# Altium PCB motorController_update.PcbDoc
Units mm, origin at the board's own origin, x right, y up, seen from the top; angles counter-clockwise.
Board outline 108.05 x 100.25 mm, 2 copper layers (Top Layer, Bottom Layer); 57 components, 90 nets, 226 pads, 3 vias.
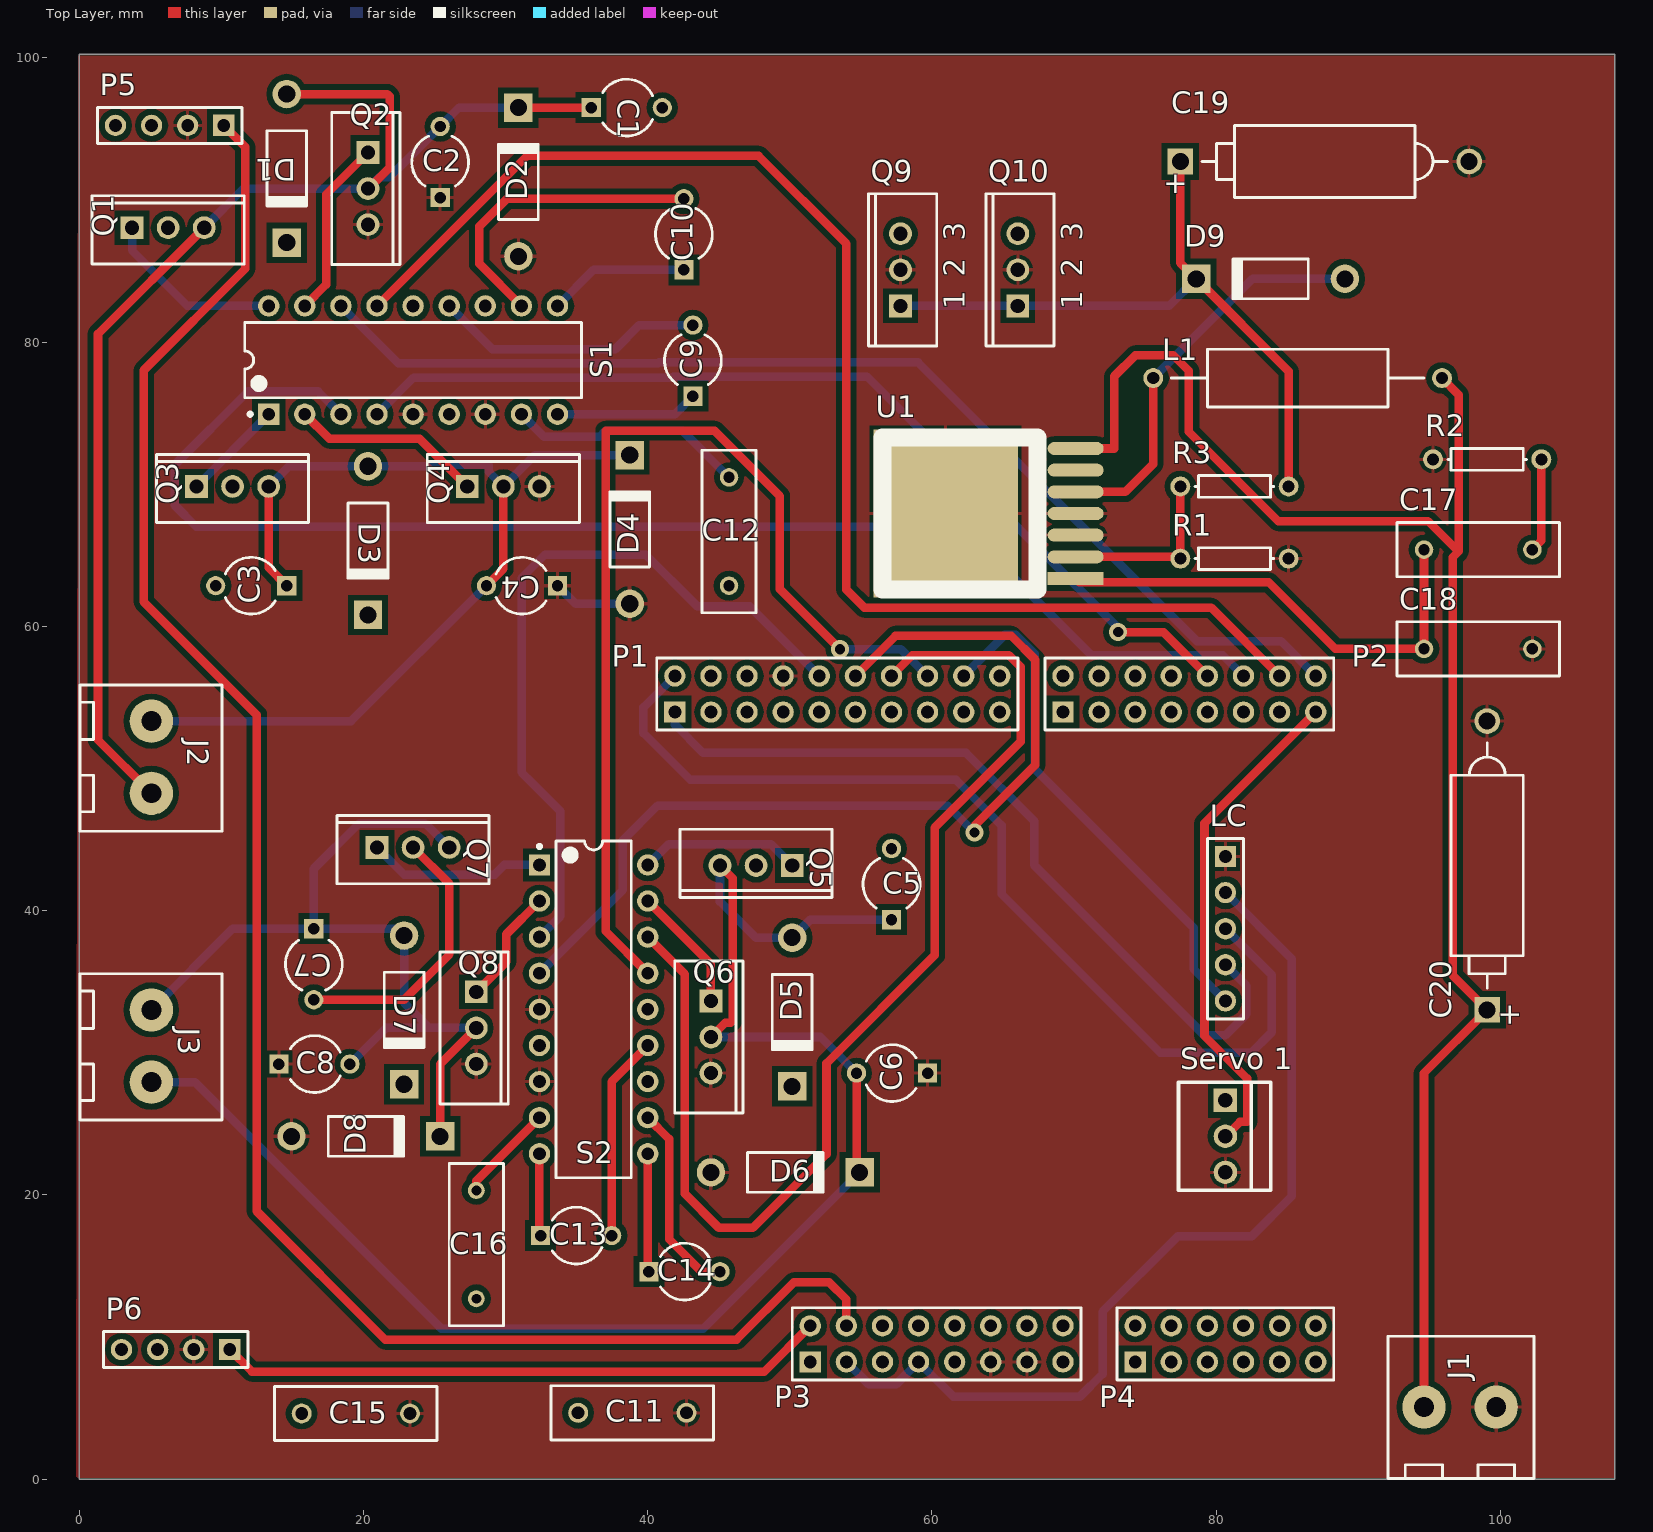
[diagram p0: Top Layer view]
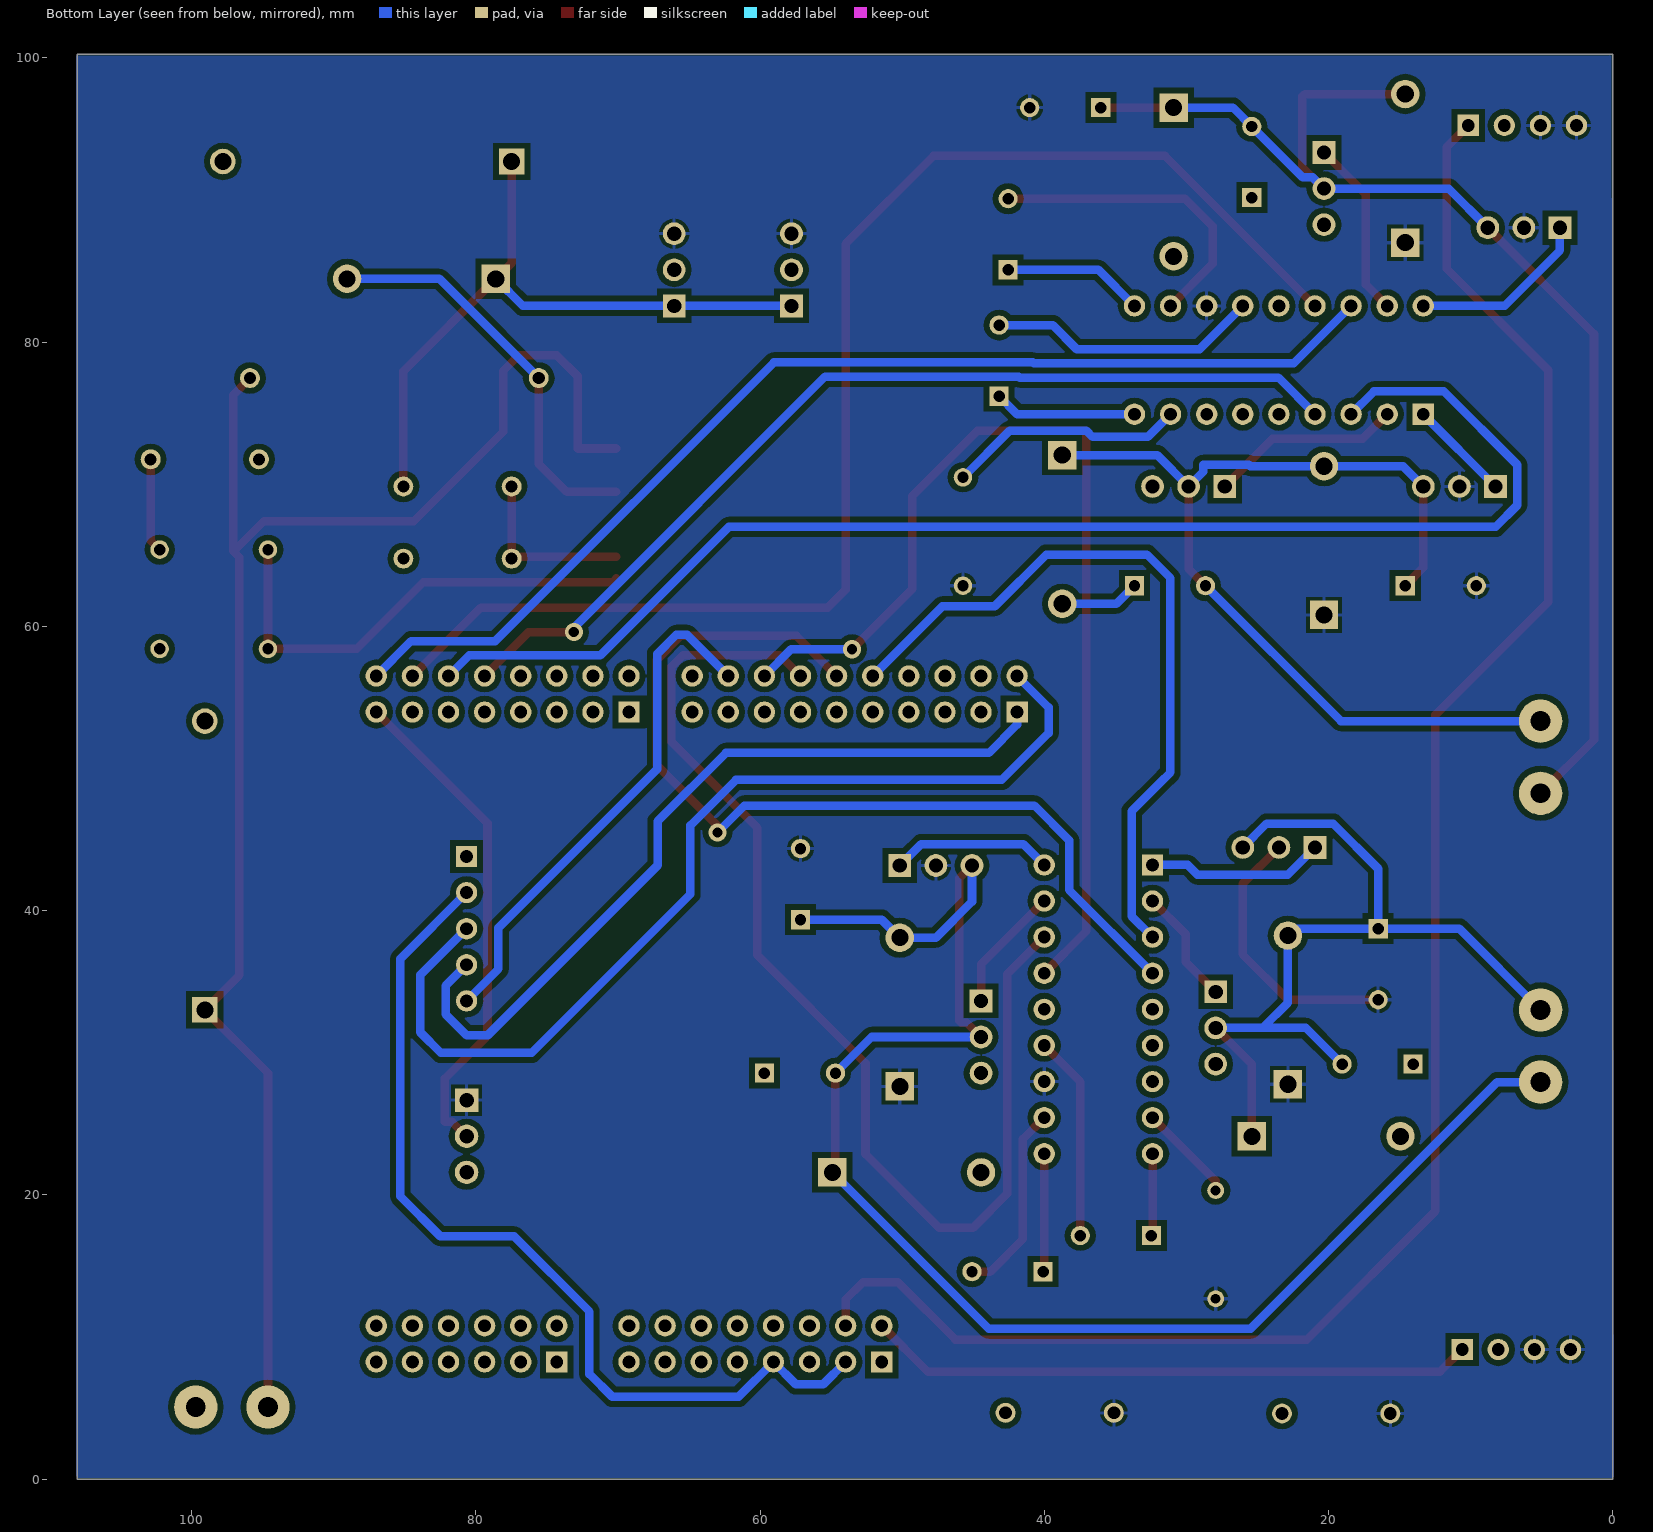
[diagram p1: Bottom Layer view, seen from below]

## Layer stack, top to bottom
Top Solder: solder mask 0.0102, Solder Resist, Dk 3.5
Top Layer: signal copper 0.0356
Dielectric1: dielectric 0.32, FR-4, Dk 4.8
Bottom Layer: signal copper 0.0356
Bottom Solder: solder mask 0.0102, Solder Resist, Dk 3.5

## Board outline
0,0 0,100.25 108.05,100.25 108.05,0

## Design rules (kind name [scope] priority, off if disabled: settings)
Clearance [All] p1: gap=0.4
HoleSize [All] p1: absolutevalues=TRUE maxlimit=5 minlimit=0.025 maxpercent=80.000 minpercent=20.000
PolygonConnect [All] p1: connectstyle=Relief reliefconductorwidth=0.254 reliefentries=4 polygonreliefangle="90 Angle" airgapwidth=0.254
RoutingVias [All] p1: holewidth=0.711 width=1.27 viastyle="Through Hole" minholewidth=0.711 minwidth=1.27 maxholewidth=0.711 maxwidth=1.27
SilkToSolderMaskClearance SilkscreenOverComponentPads [IsPad] p1: minsilkscreentomaskgap=0.254 clearancetoexposedcopper=TRUE
SolderMaskExpansion [All] p1: expansion=0.102
Width ThickWidth [All] p1: maxlimit=3 minlimit=0.254 preferedwidth=0.6 minimp=50.000000 maximp=50.000000 favimp=50.000000
28 further rules are at their usual default settings.

## Components (designator, comment, footprint, x,y, rotation, side; value= is the part's Value field where it differs from the comment)
C1 "Cap2" CAPR5-4X5 38.525,96.5 r0 top
C2 "Cap2" CAPR5-4X5 25.4,92.67 r90 top
C3 "Cap2" CAPR5-4X5 12.105,62.865 r180 top
C4 "Cap2" CAPR5-4X5 31.155,62.865 r180 top
C5 "Cap2" CAPR5-4X5 57.15,41.87 r90 top
C6 "Cap2" CAPR5-4X5 57.19,28.575 r180 top
C7 "Cap2" CAPR5-4X5 16.51,36.235 r270 top
C8 "Cap2" CAPR5-4X5 16.55,29.21 r0 top
C9 "Cap2" CAPR5-4X5 43.18,78.7 r90 top
C10 "Cap2" CAPR5-4X5 42.545,87.59 r90 top
C11 "Cap" RAD-0.3#1 38.915,4.675 r0 top
C12 "Cap" RAD-0.3#2 45.72,66.675 r270 top
C13 "Cap2" CAPR5-4X5 34.965,17.145 r0 top
C14 "Cap2" CAPR5-4X5 42.585,14.605 r0 top
C15 "Cap" RAD-0.3#1 19.465,4.625 r0 top
C16 "Cap" RAD-0.3#3 27.94,16.51 r270 top
C17 "Cap" RAD-0.3#2 98.425,65.405 r180 top
C18 "Cap" RAD-0.3#2 98.425,58.42 r180 top
C19 "Cap Pol2" POLAR0.8 87.63,92.71 r180 top
C20 "Cap Pol2" POLAR0.8 99.06,43.18 r270 top
D1 "Diode 1N4004" DO-41 14.605,92.225 r270 top
D2 "Diode 1N4004" DO-41 30.9,91.27 r90 top
D3 "Diode 1N4004" DO-41 20.32,66.04 r270 top
D4 "Diode 1N4004" DO-41 38.735,66.825 r90 top
D5 "Diode 1N4004" DO-41 50.165,32.87 r270 top
D6 "Diode 1N4004" DO-41 49.68,21.59 r0 top
D7 "Diode 1N4004" DO-41 22.86,33.02 r270 top
D8 "Diode 1N4004" DO-41 20.17,24.13 r0 top
D9 "Diode 1N4934" DO-41 83.82,84.455 r180 top
J1 "282857-2" 282857-2 94.615,5.08 r270 top
J2 "282857-2" 282857-2 5.08,53.34 r180 top
J3 "282857-2" 282857-2 5.08,33.02 r180 top
L1 "Inductor Adj" AXIAL-0.8 85.725,77.47 r0 top
LC "Header 5" HDR1X5 80.645,43.815 r270 top
P1 "Header 10X2" HDR2X10 41.91,53.975 r0 top
P2 "Header 8X2" HDR2X8 69.215,53.975 r0 top
P3 "Header 8X2" HDR2X8 51.435,8.255 r0 top
P4 "Header 6X2" HDR2X6 74.295,8.255 r0 top
P5 "Header 4" HDR1X4 10.175,95.25 r180 top
P6 "Header 4" HDR1X4 10.6,9.125 r180 top
Q1 "SCR" TO-220-AB 6.26,88.05 r0 top
Q2 "SCR" TO-220-AB 20.32,90.805 r270 top
Q3 "SCR" TO-220-AB 10.795,69.85 r0 top
Q4 "SCR" TO-220-AB 29.845,69.85 r0 top
Q5 "SCR" TO-220-AB 47.625,43.18 r180 top
Q6 "SCR" TO-220-AB 44.45,31.115 r270 top
Q7 "SCR" TO-220-AB 23.495,44.45 r0 top
Q8 "SCR" TO-220-AB 27.94,31.75 r270 top
Q9 "SCR" TO-220-AB 57.785,85.09 r90 top
Q10 "SCR" TO-220-AB 66.04,85.09 r90 top
R1 "Res1" AXIAL-0.3 81.28,64.77 r180 top
R2 "Res1" AXIAL-0.3 99.06,71.755 r0 top
R3 "Res1" AXIAL-0.3 81.28,69.85 r0 top
S1 "MAX620" DIP-18 23.495,78.74 r90 top
S2 "MAX620" DIP-18 36.195,33.06 r0 top
"Servo 1" "640454-3" 6404543 80.645,24.13 r0 top
U1 "LT1370" DDPak7 70.104,67.945 r90 top

## Footprints (in the part's own frame and the unit in brackets; to place one, negate y for a bottom-side part, rotate by r counter-clockwise, add the part's x,y. Pads: shape width x height; smd on the part's side, far side on the other; paste and mask are expansions set on the pad)
282857-2 [mil] "TE CONNECTIVITY / BUCHANAN  282857-2  Wire-To-Board Terminal Block, 2, 300 V, 24 A, 30 AWG, 12 AWG, 3 mm²"
  round 120 hole 55: 1(0,0) 2(0,200)
  silkscreen extent -196,-100 198,305, body extent -196,-100 198,320, height 752
6404543 [mil] "Headers & Wire Housings POLARIZED HEADER 3P Straight Post tin"
  rect 65x65 hole 40: 1(0,100)
  round 65 hole 40: 2(0,0) 3(0,-100)
  silkscreen extent -130,-150 126,150, body extent -130,-150 125,150, height 395
AXIAL-0.3 [mm] "Axial Device, Thru-Hole; 2 Leads; 0.3 in Pin Spacing"
  round 1.4 hole 0.85: 1(-3.81,0) 2(3.81,0)
  silkscreen extent -2.77,-0.76 2.77,0.76
AXIAL-0.8 [mm] "Axial Device, Thru-Hole; 2 Leads; 0.8 in Pin Spacing"
  round 1.4 hole 0.85: 1(-10.16,0) 2(10.16,0)
  silkscreen extent -8.89,-2.03 8.89,2.03
CAPR5-4X5 [mm] "Capacitor; 2 Leads"
  rect 1.35x1.35 hole 0.8: 1(-2.5,0)
  round 1.35 hole 0.8: 2(2.5,0)
  silkscreen extent -1.69,-2 1.82,2
DDPak7 [mil] "7 Lead Plastic DD Pak"
  rect 36x155 smd: 1(-180,0)
  oval 36x155 smd: 2(-120,0) 3(-60,0) 4(0,0) 5(60,0) 6(120,0) 7(180,0)
  rect 465x400 smd: 4(0,360)
  silkscreen extent -210,105 210,535
DIP-18 [mm] "DIP; 18 Leads; Row Spacing 7.62 mm; Pitch 2.54 mm"
  rect 1.5x1.5 hole 0.9: 1(-3.81,10.16)
  round 1.5 hole 0.9: 2(-3.81,7.62) 3(-3.81,5.08) 4(-3.81,2.54) 5(-3.81,0) 6(-3.81,-2.54) 7(-3.81,-5.08) 8(-3.81,-7.62) 9(-3.81,-10.16) 10(3.81,-10.16) 11(3.81,-7.62) 12(3.81,-5.08) 13(3.81,-2.54) 14(3.81,0) 15(3.81,2.54) 16(3.81,5.08) 17(3.81,7.62) 18(3.81,10.16)
  silkscreen extent -3.93,-11.85 2.65,11.85, body extent -3.6,-11.8 3.6,11.8, height 5.08
DO-41 [mm] "Diode, Axial; Body 5.2 x 2.7 mm (LxDia. max), Lead Dia. 0.86 mm (max)"
  round 2 hole 1.2: 1(-5.23,0)
  rect 2x2 hole 1.2: 2(5.23,0)
  silkscreen extent -2.65,-1.4 2.75,1.4
HDR1X4 [mm] "Connector; Header; 4 Position"
  rect 1.5x1.5 hole 0.9: 1(0,0)
  round 1.5 hole 0.9: 2(2.54,0) 3(5.08,0) 4(7.62,0)
  silkscreen extent -1.27,-1.27 8.89,1.27
HDR1X5 [mm] "Connector; Header; 5 Position"
  rect 1.5x1.5 hole 0.9: 1(0,0)
  round 1.5 hole 0.9: 2(2.54,0) 3(5.08,0) 4(7.62,0) 5(10.16,0)
  silkscreen extent -1.27,-1.27 11.43,1.27
HDR2X6 [mm] "Connector; Header; 6x2 Position"
  rect 1.5x1.5 hole 0.9: 1(0,0)
  round 1.5 hole 0.9: 2(0,2.54) 3(2.54,0) 4(2.54,2.54) 5(5.08,0) 6(5.08,2.54) 7(7.62,0) 8(7.62,2.54) 9(10.16,0) 10(10.16,2.54) 11(12.7,0) 12(12.7,2.54)
  silkscreen extent -1.27,-1.27 13.97,3.81
HDR2X8 [mm] "Connector; Header; 8x2 Position"
  rect 1.5x1.5 hole 0.9: 1(0,0)
  round 1.5 hole 0.9: 2(0,2.54) 3(2.54,0) 4(2.54,2.54) 5(5.08,0) 6(5.08,2.54) 7(7.62,0) 8(7.62,2.54) 9(10.16,0) 10(10.16,2.54) 11(12.7,0) 12(12.7,2.54) 13(15.24,0) 14(15.24,2.54) 15(17.78,0) 16(17.78,2.54)
  silkscreen extent -1.27,-1.27 19.05,3.81
HDR2X10 [mm] "Connector; Header; 10x2 Position"
  rect 1.5x1.5 hole 0.9: 1(0,0)
  round 1.5 hole 0.9: 2(0,2.54) 3(2.54,0) 4(2.54,2.54) 5(5.08,0) 6(5.08,2.54) 7(7.62,0) 8(7.62,2.54) 9(10.16,0) 10(10.16,2.54) 11(12.7,0) 12(12.7,2.54) 13(15.24,0) 14(15.24,2.54) 15(17.78,0) 16(17.78,2.54) 17(20.32,0) 18(20.32,2.54) 19(22.86,0) 20(22.86,2.54)
  silkscreen extent -1.27,-1.27 24.13,3.81
POLAR0.8 [mm] "Polarized Capacitor; 2 Leads"
  rect 1.8x1.8 hole 1.2: 1(10.16,0)
  round 1.8 hole 1.2: 2(-10.16,0)
  silkscreen extent -8.64,-2.54 8.64,2.54
RAD-0.3#1 [mm] "Radial Cap, Thru-Hole; 2 Leads; 0.3 in Pin Spacing"
  round 1.4 hole 0.9: 1(-3.81,0) 2(3.81,0)
  silkscreen extent -5.71,-1.91 5.71,1.91
RAD-0.3#2 [mm] "Radial Cap, Thru-Hole; 2 Leads; 0.3 in Pin Spacing"
  round 1.3 hole 0.8: 1(-3.81,0) 2(3.81,0)
  silkscreen extent -5.71,-1.91 5.71,1.91
RAD-0.3#3 [mm] "Radial Cap, Thru-Hole; 2 Leads; 0.3 in Pin Spacing"
  round 1.2 hole 0.7: 1(-3.81,0) 2(3.81,0)
  silkscreen extent -5.71,-1.91 5.71,1.91
TO-220-AB [mm] "TO, Thru-Hole, Vertical, Heatsink Mounted; 3 In-Line Leads; Pitch 2.54 mm"
  rect 1.6x1.6 hole 1: 1(-2.54,0)
  round 1.6 hole 1: 2(0,0) 3(2.54,0)
  silkscreen extent -5.35,-2.55 5.35,2.25

## Part data
C1 C2 C3 C4 C5 C6 C7 C8 C9 C10 C11 C12 C13 C14 C15 C16 C17 C18: "Capacitor"
C19 C20: "Polarized Capacitor (Axial)"
D1 D2 D3 D4 D5 D6 D7 D8: "1 Amp General Purpose Rectifier"
D9: "1 Amp Fast Recovery Rectifier"
L1: "Adjustable Inductor"
LC: "Header, 5-Pin"
P1: "Header, 10-Pin, Dual row"
P2 P3: "Header, 8-Pin, Dual row"
P4: "Header, 6-Pin, Dual row"
P5 P6: "Header, 4-Pin"
Q1 Q2 Q3 Q4 Q5 Q6 Q7 Q8 Q9 Q10: "Silicon Controlled Rectifier"
R1 R2 R3: "Resistor"
S1 S2: library part "SW DIP-9", "DIP Switch, 9 Position, SPST"
"Servo 1": "Headers & Wire Housings POLARIZED HEADER 3P Straight Post tin"

## Via types
v1: diameter 1.27, hole 0.711, Top Layer to Bottom Layer, 3 vias

## Nets (pads, with @x,y where several pads share a name; then routed paths per layer and width w, separated by ;. In a path a pad name is that pad's centre, name@x,y a point inside that pad or via, vN(x,y) a via of type N, cw(c..) or ccw(c..) an arc to the next point about the centre after c; other vN are vias at no path point)
3V3: LC.2 P3.3 P3.7 | length 65.4
  Bottom Layer w0.6: P3.3 55.55,6.68 57.48,6.68 P3.7 61.51,5.8 70.4,5.8 72,7.4 72,11.8 77.3,17.1 82.5,17.1 85.3,19.9 85.3,36.62 LC.2
"5-9 VIN": P3.15
5V: "Servo 1.1" C1.2 C3.2 C5.2 C7.2 C11.1 C12.2 C15.1 C16.2 D1.2 D3.2 D5.2 D7.2 P5.3 P5.4 P6.3 P6.4 Q1.2 Q3.2 Q5.2 Q7.2 Q9.3 Q10.3 S1.12 S2.12 | length 19.4
  Top Layer w0.6: C7.2 22.86,33.735 26.05,36.925 26.05,41.895 Q7.2
5V/USB: P3.9
12_OUT: C19.1 D9.2 Q9.1 Q10.1 R3.2 | length 47.6
  Top Layer w0.6: C19.1 77.47,85.575 D9.2 85.09,77.955 R3.2
  Bottom Layer w0.6: Q9.1 Q10.1 76.685,82.55 D9.2
AREF: P1.6
GND: "Servo 1.3" C2.1 C4.1 C6.1 C8.1 C11.2 C15.2 C18.1 C19.2 C20.2 D2.1 D4.1 D6.1 D8.1 J1.2 LC.1 P1.8 P3.11 P3.13 P5.2 P6.2 Q2.3 Q4.3 Q6.3 Q8.3 Q9.2 Q10.2 R1.1 R2.1 S1.5 S1.7 S2.5 S2.7 U1.3 U1.4 | length 5.6
  Bottom Layer w0.6: C4.1 34.925,61.595 D4.1
"LM 1": Q1.1 S1.18 | length 12.8
  Bottom Layer w0.6: Q1.1 3.72,86.45 7.62,82.55 S1.18
"LM 2": Q2.1 S1.17 | length 12.6
  Top Layer w0.6: S1.17 17.374,84.049 17.374,90.399 Q2.1
"LM 3": Q3.1 S1.1 | length 7.2
  Bottom Layer w0.6: Q3.1 S1.1
"LM 4": Q4.1 S1.2 | length 13.5
  Top Layer w0.6: S1.2 17.602,73.203 23.952,73.203 Q4.1
M1+: C1.1 C2.2 D1.1 D2.2 J2.2 Q1.3 Q2.2 | length 89.7
  Top Layer w0.6: J2.2 1.325,52.015 1.325,80.575 Q1.3 ; D1.1 21.671,97.455 21.844,97.282 21.844,92.267 Q2.2@20.305,90.728 ; D2.2 C1.1
  Bottom Layer w0.6: Q1.3 11.555,90.805 Q2.2 21.107,91.592 21.822,91.592 C2.2 26.73,96.5 D2.2
M1-: C3.1 C4.2 D3.1 D4.2 J2.1 Q3.3 Q4.2 | length 70.4
  Top Layer w0.6: Q3.3 13.335,64.135 C3.1 ; C4.2 29.845,64.055 Q4.2
  Bottom Layer w0.6: J2.1 19.13,53.34 C4.2 ; Q3.3 14.755,71.27 D3.1 25.502,71.27 25.606,71.374 28.829,71.374 28.829,70.866 Q4.2 32.05,72.055 D4.2
M2+: C5.1 C6.2 D5.1 D6.2 J3.2 Q5.3 Q6.2 | length 109.4
  Top Layer w0.6: Q6.2 45.466,32.131 45.847,32.131 45.974,32.258 45.974,42.291 Q5.3 ; C6.2 54.69,21.81 D6.2
  Bottom Layer w0.6: J3.2 8.135,27.94 25.475,10.6 43.92,10.6 D6.2 ; Q6.2 52.15,31.115 C6.2 ; Q5.3 45.085,40.64 47.625,38.1 D5.1 51.435,39.37 C5.1
M2-: C7.1 C8.2 D7.1 D8.2 J3.1 Q7.3 Q8.2 | length 61.9
  Top Layer w0.6: D8.2 25.4,29.21 Q8.2
  Bottom Layer w0.6: J3.1 10.795,38.735 C7.1 ; C8.2 21.59,31.75 24.638,31.75 ; Q7.3 24.359,46.126 19.685,46.126 16.51,42.951 C7.1 ; Q8.2 24.638,31.75 ; C7.1 22.375,38.735 D7.1 22.86,33.528 24.638,31.75
NC: P1.5
NetC9_1: C9.1 S1.9 | length 10.1
  Bottom Layer w0.6: S1.9 41.91,74.93 C9.1
NetC9_2: C9.2 S1.13 | length 19.1
  Bottom Layer w0.6: S1.13 29.08,79.505 37.711,79.505 39.406,81.2 C9.2
NetC10_1: C10.1 S1.10 | length 9.9
  Bottom Layer w0.6: S1.10 36.195,85.09 C10.1
NetC10_2: C10.2 S1.11 | length 22
  Top Layer w0.6: S1.11 28.143,85.522 28.143,88.138 30.095,90.09 C10.2
NetC12_1: C12.1 S1.8 | length 16.8
  Bottom Layer w0.6: S1.8 32.715,73.33 36.601,73.33 37.033,73.762 42.443,73.762 C12.1
NetC13_1: C13.1 S2.9 | length 5.8
  Top Layer w0.6: S2.9 32.385,17.225 C13.1
NetC13_2: C13.2 S2.13 | length 14.4
  Top Layer w0.6: C13.2 37.465,27.98 S2.13
NetC14_1: C14.1 S2.10 | length 8.3
  Top Layer w0.6: S2.10 40.005,14.685 C14.1
NetC14_2: C14.2 S2.11 | length 13.7
  Top Layer w0.6: S2.11 41.5,23.945 41.5,16.9 43.795,14.605 C14.2
NetC16_1: C16.1 S2.8 | length 7
  Top Layer w0.6: C16.1 27.94,20.995 S2.8
NetC17_1: C17.1 R2.2 | length 6.6
  Top Layer w0.6: C17.1 102.87,66.04 R2.2
NetC17_2: C17.2 C18.2 U1.1 | length 33.5
  Top Layer w0.6: U1.1 70.377,63.1 83.7,63.1 88.38,58.42 C18.2 C17.2
NetD9_1: D9.1 L1.1 U1.5 | length 28.7
  Top Layer w0.6: U1.5 73.609,69.469 75.565,71.425 L1.1
  Bottom Layer w0.6: L1.1 82.55,84.455 D9.1
NetR1_2: R1.2 R3.1 U1.2 | length 12.5
  Top Layer w0.6: U1.2 77.343,64.897 R1.2 R3.1
PTA1: P2.14 S1.15 | length 97.3
  Top Layer w0.6: S1.15 31.505,93.1 47.8,93.1 53.975,86.925 53.975,62.586 55.245,61.316 79.654,61.316 P2.14
PTA2: P2.16 S1.16 | length 79.4
  Bottom Layer w0.6: S1.16 22.46,78.505 40.735,78.505 40.805,78.575 59.017,78.575 78.627,58.965 84.545,58.965 P2.16
PTA4: P2.8
PTA5: P2.6
PTA12: P2.10 S1.4 | length 68.4
  Top Layer w0.6: v1(73.1,59.6) 76.3,59.6 76.295,59.595 P2.10
  Bottom Layer w0.6: S1.4 23.53,77.505 41.713,77.505 41.783,77.575 55.419,77.575 73.1,59.894 v1(73.1,59.6)
PTA13: P1.20
PTA16: P1.11
PTA17: P1.9
PTA20/RESET: P3.5
PTB0: P4.1
PTB1: P4.3
PTB2: P4.5
PTB3: P4.7
PTB8: P3.2 P6.1 | length 42.8
  Top Layer w0.6: P6.1 12.15,7.575 48.215,7.575 P3.2
PTB9: P3.4 P5.1 | length 132.5
  Top Layer w0.6: P5.1 11.675,93.75 11.675,85.15 4.55,78.025 4.55,61.725 12.5,53.775 12.5,18.85 21.525,9.825 46.25,9.825 50.275,13.85 52.775,13.85 53.975,12.65 P3.4
PTB10: P3.6
PTB11: P3.8
PTC0: P2.13
PTC1: P4.11
PTC2: P4.9
PTC3: P2.11
PTC4: P2.9
PTC5: P2.7
PTC6: P2.5
PTC7: "Servo 1.2" P2.15 | length 35.3
  Top Layer w0.6: 80.645,24.13 81.659,25.144 82.171,25.144 82.171,28.196 79.172,31.194 79.172,46.152 P2.15
PTC8: P2.4
PTC9: P2.2
PTC10: P2.3
PTC11: P2.1
PTC12: P1.19
PTC13: P1.17
PTC16: P1.15
PTC17: P1.13
PTD0: P1.16 S2.15 | length 73
  Top Layer w0.6: S2.15 37.033,38.572 37.033,73.762 44.704,73.762 49.301,69.164 49.301,62.611 v1(53.518,58.395)
  Bottom Layer w0.6: v1(53.518,58.395) 57.81,58.395 P1.16
PTD1: P1.10 S2.3 | length 52.2
  Bottom Layer w0.6: S2.3 33.858,39.613 33.858,46.992 31.85,49 31.125,49.725 31.125,63.4 32.775,65.05 39.852,65.05 43.485,61.417 47.168,61.417 P1.10
PTD2: P1.14 S2.16 | length 82.2
  Top Layer w0.6: S2.16 42.6,35.545 42.6,20.1 45,17.7 47.4,17.7 52.578,22.878 52.578,29.261 60.2,36.883 60.2,45.852 66.243,51.895 66.243,57.15 65.405,57.988 58.623,57.988 P1.14
PTD3: P1.12 S2.4 | length 66.8
  Top Layer w0.6: P1.12 57.429,59.334 65.583,59.334 67.259,57.658 67.259,50.241 63,45.982 v1(63,45.5)
  Bottom Layer w0.6: S2.4 38.252,41.467 38.252,44.958 40.694,47.4 61.1,47.4 v1(63,45.5)
PTD4: P2.12 S1.3 | length 97.5
  Bottom Layer w0.6: S1.3 16.815,76.53 11.887,76.53 6.731,71.374 6.731,68.529 8.255,67.005 62.195,67.005 71.235,57.965 80.465,57.965 P2.12
PTD5: LC.5 P1.18 | length 36.7
  Bottom Layer w0.6: P1.18 65.115,59.4 65.9,59.4 67.233,58.067 67.233,49.967 78.4,38.8 78.4,35.9 LC.5
PTD6: P1.3
PTD7: LC.4 P1.1 | length 56.7
  Bottom Layer w0.6: P1.1 41.91,53.09 43.9,51.1 62.4,51.1 67.2,46.3 67.2,43.2 79.158,31.242 80.645,31.242 82.118,32.715 82.118,34.722 LC.4
PTE0: P1.4
PTE1: LC.3 P1.2 | length 70.5
  Bottom Layer w0.6: P1.2 39.7,54.305 39.7,52.5 43,49.2 61.7,49.2 64.9,46 64.9,41.17 76.073,29.997 82.448,29.997 83.9,31.449 83.9,35.48 LC.3
PTE2: P3.10
PTE3: P3.12
PTE4: P3.14
PTE5: P3.16
PTE20: P4.2
PTE21: P4.4
PTE22: P4.6
PTE23: P4.8
PTE29: P4.10
PTE30: P4.12
PTE31: P1.7
"RM 1": Q5.1 S2.18 | length 11.4
  Bottom Layer w0.6: S2.18 41.465,44.68 48.665,44.68 Q5.1
"RM 2": Q6.1 S2.17 | length 8.9
  Top Layer w0.6: S2.17 44.45,36.235 Q6.1
"RM 3": Q7.1 S2.1 | length 12.5
  Bottom Layer w0.6: Q7.1 22.86,42.545 29.235,42.545 29.91,43.22 S2.1
"RM 4": Q8.1 S2.2 | length 8.2
  Top Layer w0.6: Q8.1 30.048,36.398 30.048,38.343 S2.2
SDA_PTD5: P3.1
V_BATT: C20.1 J1.1 L1.2 U1.7 | length 116.8
  Top Layer w0.6: U1.7 72.822,72.517 72.822,77.597 74.295,79.07 76.987,79.07 78.08,77.978 78.08,73.685 84.353,67.412 94.888,67.412 97.038,65.262 ; J1.1 94.615,28.575 C20.1 96.625,35.455 96.625,64.85 97.05,65.275 97.05,76.305 L1.2
pads on no net: S1.6 S1.14 S2.6 S2.14 U1.6

## Polygon pours and split planes (outlines as drawn)
5V on Bottom Layer "Bottom Layer-5V" (solid, remove dead copper, pour order 34): 0.125,100.3 0.275,100.15 108.1,100.15 108.1,0.25 107.95,0.1 -0.05,0.1
GND on Top Layer "Top Layer-GND" (solid, remove dead copper, pour order 36): -0.05,100.15 107.95,100.15 108.1,100.3 107.95,100.15 107.95,0.1 -0.2,0.1

## Silkscreen, mask and mechanical layers (free items; w line width, h text height)
Top Overlay:
  text "RESET" at 52.578,-88.011 h0.51 r45
  text "3v3" at 55.118,-88.011 h0.51 r45
  text "5v" at 57.658,-88.011 h0.51 r45
  text "GND" at 60.198,-88.011 h0.51 r45
  text "GND" at 62.738,-88.011 h0.51 r45
  text "Vin" at 65.278,-88.011 h0.51 r45
Mechanical 1:
  lines w0.25: 0,0 0,100.325 107.95,100.325 107.95,-0.075 107.875,0 0,0

## Text inside footprints (layer, text, board x,y; h text height)
C19: Top Overlay "+" at 77.978,91.76 h1.5 r180
C20: Top Overlay "+" at 100.01,33.528 h1.5 r270
Q9: Top Overlay "3" at 62.31,87.13 h1.5 r90; Top Overlay "2" at 62.31,84.59 h1.5 r90; Top Overlay "1" at 62.31,82.3 h1.5 r90
Q10: Top Overlay "3" at 70.565,87.13 h1.5 r90; Top Overlay "2" at 70.565,84.59 h1.5 r90; Top Overlay "1" at 70.565,82.3 h1.5 r90